# Altium PCB hand_sense_template.PcbDoc
Units mil, origin at the board's own origin, x right, y up, seen from the top; angles counter-clockwise.
Board outline 3797.46 x 1463.31 mil, 4 copper layers (Top Layer, Int1 (GND), Int2 (PWR), Bottom Layer), stack 53.912 mil thick; 7 components, 54 nets, 86 pads, 5 vias.
Unrouted connection lines stored in the file: 174.
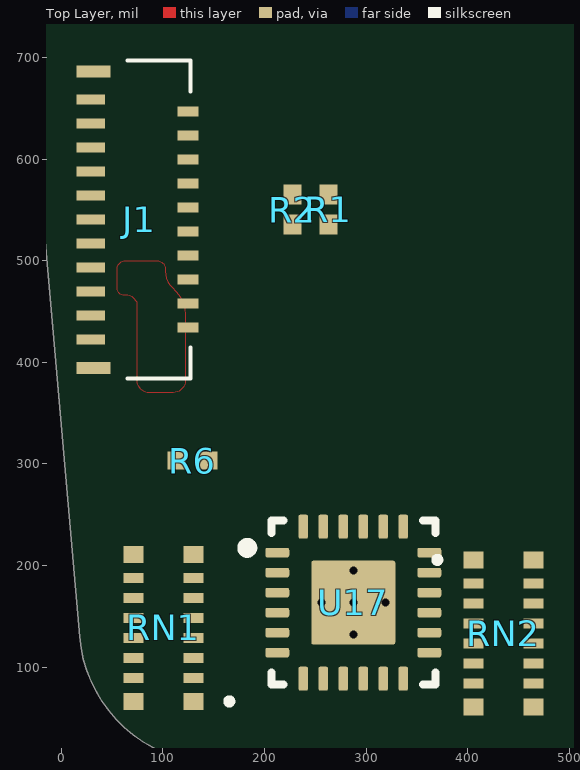
[diagram p0: Top Layer view]
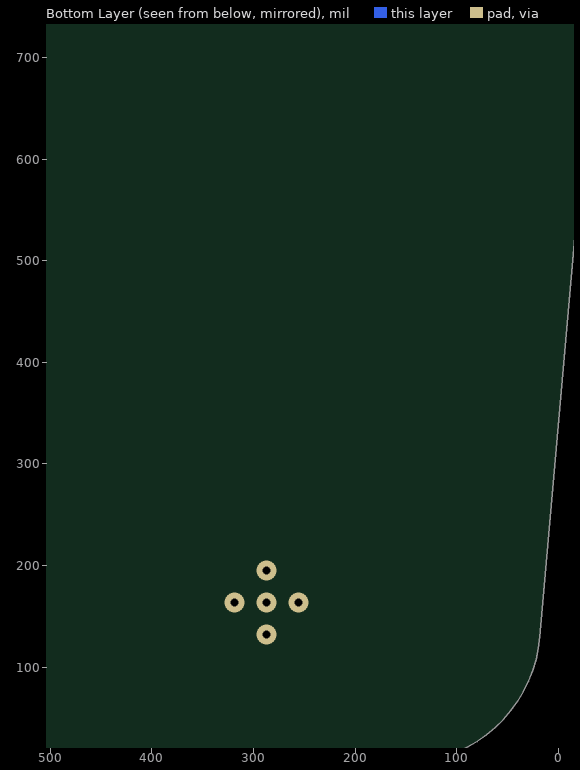
[diagram p1: Bottom Layer view, seen from below]

## Layer stack, top to bottom
Top Solder: solder mask 1, SM-001, Dk 4
Top Layer: signal copper 1.378
Dielectric 1: prepreg 5.1, PP-017, Dk 4.3
Dielectric 2: prepreg 5.1, PP-017, Dk 4.3
Int1 (GND): signal copper 1.378
Dielectric 3: core 28, Core-039, Dk 4.8
Int2 (PWR): signal copper 1.378
Dielectric 4: prepreg 5.1, PP-017, Dk 4.3
Dielectric 5: prepreg 5.1, PP-017, Dk 4.3
Bottom Layer: signal copper 1.378
Bottom Solder: solder mask 1, SM-001, Dk 4

## Board outline
154.76,4.49 3499.51,4.49 ccw(c3499.51,122.78) 3617.35,112.47 3717.18,1253.6 3712.92,1292.54 3694.08,1326.88 3663.53,1351.4 3625.92,1362.36 2420.81,1467.8 1216.09,1467.8 10.98,1362.36 -26.62,1351.4 -57.17,1326.88 -76.01,1292.54 -80.28,1253.6 18.04,129.76 ccw(c154.75,141.72)

## Design rules (kind name [scope] priority, off if disabled: settings)
BoardOutlineClearance [All] p1: gap=10 ignorepadtopadclearanceinfootprint=FALSE
Clearance [All] p1: gap=5 ignorepadtopadclearanceinfootprint=FALSE
PlaneClearance [All] p1: clearance=10
PlaneConnect [All] p1: planeconnectstyle=Direct reliefexpansion=20 reliefentries=4 reliefconductorwidth=10 reliefairgap=10
PolygonConnect [All] p1: connectstyle=Direct reliefconductorwidth=10 reliefentries=4 polygonreliefangle="90 Angle" airgapwidth=10
RoutingVias [All] p1: holewidth=10 width=20 viastyle="Through Hole" minholewidth=10 minwidth=20 maxholewidth=50 maxwidth=100
SolderMaskExpansion [All] p1: expansion=4 istentingtop=TRUE
Width [All] p1: maxlimit=40 minlimit=5 preferedwidth=10
28 further rules are at their usual default settings.

## Classes and differential pairs
component class CONNECTOR: J1
component class LOGIC: R1 R2 R6 RN1 RN2 U17

## Components (designator, comment, footprint, x,y, rotation, side; value= is the part's Value field where it differs from the comment)
J1 "503566-2102" 5035662102 74.8,540.35 r270 top
R1 "DNP" RESC1005X40X25LL05T10 262.8,550.2 r90 top
R2 "DNP" RESC1005X40X25LL05T10 227.36,550.2 r90 top
R6 "4.7K" RESC1005X40X25LL05T05 128.94,303.15 r180 top
RN1 "EXB-2HV102JV" EXB2HV102JV 100.39,138.54 r90 top
RN2 "EXB-2HV102JV" EXB2HV102JV 435.04,133.11 r270 top
U17 "TCA9548ARGER" FP-RGE0024C-MFG 287.4,163.39 r0 top

## Footprints (in the part's own frame and the unit in brackets; to place one, negate y for a bottom-side part, rotate by r counter-clockwise, add the part's x,y. Pads: shape width x height; smd on the part's side, far side on the other; paste and mask are expansions set on the pad)
5035662102 [mm]
  rect 0.25x0.72 smd: 1(-3,-1.165) 3(-2.4,-1.165) 5(-1.8,-1.165) 7(-1.2,-1.165) 9(-0.6,-1.165) 11(0,-1.165) 13(0.6,-1.165) 15(1.2,-1.165) 17(1.8,-1.165) 19(2.4,-1.165) 21(3,-1.165)
  rect 0.25x0.52 smd: 2(-2.7,1.265) 4(-2.1,1.265) 6(-1.5,1.265) 8(-0.9,1.265) 10(-0.3,1.265) 12(0.3,1.265) 14(0.9,1.265) 16(1.5,1.265) 18(2.1,1.265) 20(2.7,1.265)
  rect 0.3x0.85 smd: MP1(-3.71,-1.1) MP2(3.71,-1.1)
  silkscreen extent -3.98,-0.25 3.98,1.33, body extent -3.98,-1.54 3.98,1.31, height 0.95
EXB2HV102JV [mm]
  rect 0.425x0.5 smd: 1(-1.838,-0.75) 8(1.838,-0.75) 9(1.838,0.75) 16(-1.838,0.75)
  rect 0.25x0.5 smd: 2(-1.251,-0.75) 3(-0.751,-0.75) 4(-0.251,-0.75) 5(0.249,-0.75) 6(0.749,-0.75) 7(1.249,-0.75) 10(1.249,0.75) 11(0.749,0.75) 12(0.249,0.75) 13(-0.251,0.75) 14(-0.751,0.75) 15(-1.251,0.75)
  silkscreen extent -1.89,-1.7 -1.79,-1.6, body extent -2.01,-0.97 2.01,0.97, height 0.65
FP-RGE0024C-MFG [mm]
  rrect42% 0.6x0.24 smd paste-1000 mask+0: 1(-1.9,1.25) 2(-1.9,0.75) 3(-1.9,0.25) 4(-1.9,-0.25) 5(-1.9,-0.75) 6(-1.9,-1.25) 13(1.9,-1.25) 14(1.9,-0.75) 15(1.9,-0.25) 16(1.9,0.25) 17(1.9,0.75) 18(1.9,1.25)
  rrect42% 0.24x0.6 smd paste-1000 mask+0: 7(-1.25,-1.9) 8(-0.75,-1.9) 9(-0.25,-1.9) 10(0.25,-1.9) 11(0.75,-1.9) 12(1.25,-1.9) 19(1.25,1.9) 20(0.75,1.9) 21(0.25,1.9) 22(-0.25,1.9) 23(-0.75,1.9) 24(-1.25,1.9)
  rrect5% 2.1x2.1 smd paste-1000 mask+0: 25(0,0)
  silkscreen extent -2.77,-2.05 2.05,2.05, body extent -2.01,-2.01 2.01,2.01, height 1
RESC1005X40X25LL05T05 [mm] "Chip Resistor, 2-Leads, Body 1.05x0.55mm, IPC High Density"
  rect 0.45x0.45 smd: 1(-0.4,0) 2(0.4,0)
  body extent -0.53,-0.28 0.53,0.28, height 0.4
RESC1005X40X25LL05T10 [mm] "Chip Resistor, 2-Leads, Body 1.00x0.50mm, IPC High Density"
  rect 0.5x0.45 smd: 1(-0.375,0) 2(0.375,0)
  body extent -0.53,-0.27 0.53,0.28, height 0.4

## Part data
J1: "Connector", Manufacturer_Name=Molex, Mouser Part Number=538-503566-2102, Datasheet Link=https://www.molex.com/pdm_docs/sd/5035662102_sd.pdf, Height=1.69mm, Manufacturer_Part_Number=503566-2102, Mouser Price/Stock=https://www.mouser.co.uk/ProductDetail/Molex/503566-2102?qs=0lSvoLzn4L8%252Bw2FHrppS3g%3D%3D
R1 R2: library part CMP-2002-07941-1, Manufacturer="Yageo / Phycomp", Part Number=RC0402JR-071KL
R6: library part CMP-2002-01154-4, "Chip Resistor, 4.7 KOhm, +/- 1%, 0.1 W, -55 to 155 degC, 0402 (1005 Metric), RoHS, Tape and Reel", Case Code (Imperial)=0402, Case Code (Metric)=1005, Max Operating Temperature="155 degC", Min Operating Temperature="-55 degC", Package Quantity=1, PartNumber=ERJ-2RKF4701X, Power Rating="100 mW", Resistance="4.7 KOhm", Tolerance=1%, Voltage Rating="50 V", Case\/Package=0402, ComponentLink1Description="Manufacturer URL", ComponentLink1URL=http://www.panasonic.com/, ComponentLink2Description=Datasheet, ComponentLink2URL=http://industrial.panasonic.com/cdbs/www-data/pdf/RDA0000/AOA0000C86.pdf, DatasheetVersion=04/2015, Height="0.35 mm", Length="1 mm", Mount="Surface Mount", Mounting Technology="Surface Mount", PackageDescription="2-Pin Surface Mount Device, Body 1 x 0.5 mm", PackageReference=0402, Packaging="Cut Tape", Pins=2, Radiation Hardening=No, REACH SVHC=Yes, RoHSCompliant=true, Width="0.5 mm"
RN1 RN2: "Resistor Network", Manufacturer_Name=Panasonic, Mouser Part Number=667-EXB-2HV102JV, Arrow Part Number=EXB-2HV102JV, Arrow Price/Stock=https://www.arrow.com/en/products/exb-2hv102jv/panasonic?region=nac, Datasheet Link=https://industrial.panasonic.com/cdbs/www-data/pdf/AOC0000/AOC0000C14.pdf, Height=0.55mm, Manufacturer_Part_Number=EXB-2HV102JV, Mouser Price/Stock=https://www.mouser.co.uk/ProductDetail/Panasonic/EXB-2HV102JV?qs=oE3VwAv%2FYtkhk%252Bvg87pJMg%3D%3D
U17: library part CMP-04892-000041-1, "IC I2C SW 8CH W/RESET 24VQFN", Case/Package=VQFN, Max Operating Temperature=85°C, Max Supply Current=80uA, Max Supply Voltage=5.5V, Min Operating Temperature=-40°C, Min Supply Voltage=1.65V, On-State Resistance=70R, Package Quantity=3000, Independent Circuits=1, Lead Free="Lead Free", Mount="Surface Mount", Number of Pins=24, Packaging="Tape and Reel", Propagation Delay=1ns, Radiation Hardening=No, REACH SVHC="No SVHC", RoHS Compliant=Yes, Supply Type=Single, Weight=0.001926oz

## Via types
v1: diameter 19.68, hole 7.87, Top Layer to Bottom Layer, 5 vias

## Nets (pads, with @x,y where several pads share a name; then routed paths per layer and width w, separated by ;. In a path a pad name is that pad's centre, name@x,y a point inside that pad or via, vN(x,y) a via of type N, cw(c..) or ccw(c..) an arc to the next point about the centre after c; other vN are vias at no path point)
1V8: J1.19 J1.21
3V3: J1.1 J1.3 R1.2 R2.2 R6.2 RN1.9 RN1.10 RN1.11 RN1.12 RN1.13 RN1.14 RN1.15 RN1.16 RN2.9 RN2.10 RN2.11 RN2.12 RN2.13 RN2.14 RN2.15 RN2.16 U17.21
A_INT: 
B_INT: 
C_INT: 
D_INT: 
E_INT: 
F_INT: 
G_INT: 
GND: J1.2 J1.4 J1.5 J1.6 J1.7 J1.8 J1.9 J1.11 J1.12 J1.13 J1.14 J1.15 J1.17 J1.18 J1.MP1 J1.MP2 U17.9 U17.18 U17.22 U17.23 U17.25
  other v1: 287.4,131.89 255.91,163.39 287.4,163.39 318.9,163.39 287.4,194.88
H_INT: 
I2C_CH1_SCK: RN1.7 U17.2
I2C_CH1_SDA: RN1.8 U17.1
I2C_CH2_SCK: RN2.1 U17.17
I2C_CH2_SDA: RN2.2 U17.16
I2C_CH3_SCK: RN1.5 U17.4
I2C_CH3_SDA: RN1.6 U17.3
I2C_CH4_SCK: RN1.3 U17.6
I2C_CH4_SDA: RN1.4 U17.5
I2C_CH5_SCK: RN2.3 U17.15
I2C_CH5_SDA: RN2.4 U17.14
I2C_CH6_SCK: RN2.5 U17.13
I2C_CH6_SDA: RN2.6 U17.12
I2C_CH7_SCK: RN1.1 U17.8
I2C_CH7_SDA: RN1.2 U17.7
I2C_CH8_SCK: RN2.7 U17.11
I2C_CH8_SDA: RN2.8 U17.10
I_INT: 
J_INT: 
K_INT: 
L_INT: 
M_INT: 
N_INT: 
NetC3_1: 
NetC6_1: 
NetC9_1: 
NetC12_1: 
NetC15_1: 
NetC18_1: 
NetC21_1: 
NetC24_1: 
NetC27_1: 
NetC30_1: 
NetC33_1: 
NetC36_1: 
NetC39_1: 
NetC42_1: 
NetC45_1: 
NetC48_1: 
O_INT: 
P_INT: 
PALM_I2C_SCL: J1.20 R1.1 U17.19
PALM_I2C_SDA: J1.16 R2.1 U17.20
PALM_RESET: J1.10 R6.1 U17.24

## Polygon pours and split planes (outlines as drawn)
3V3 on Top Layer "3V3_L01_P000" (solid, pour order 0): 62.99,500 94.49,500 cw(c94.49,492.13) 102.36,492.13 102.36,489.82 ccw(c125.31,489.82) 109.08,473.59 112.54,470.13 cw(c89.6,447.19) 122.05,447.19 122.05,381.89 cw(c110.24,381.89) 110.24,370.08 86.61,370.08 cw(c86.61,381.89) 74.8,381.89 74.8,459.28 70.79,463.3 ccw(c64.03,456.55) 62.61,465.99 cw(c61.64,472.44) 55.12,472.44 55.12,492.13 cw(c62.99,492.13)

## Other copper
Top Layer:
  pour cut-out: 19.68,688.98 137.8,688.98 137.8,383.86 19.68,383.86
  pour cut-out: 370.38,239.11 209.73,241.14 207.6,81.69 370.38,81.69

## Silkscreen, mask and mechanical layers (free items; w line width, h text height)
Mechanical 1:
  the board outline again, w8